# EAGLE board BMS Segment rev4 (EAGLE 8.4.1), part 1 of 2
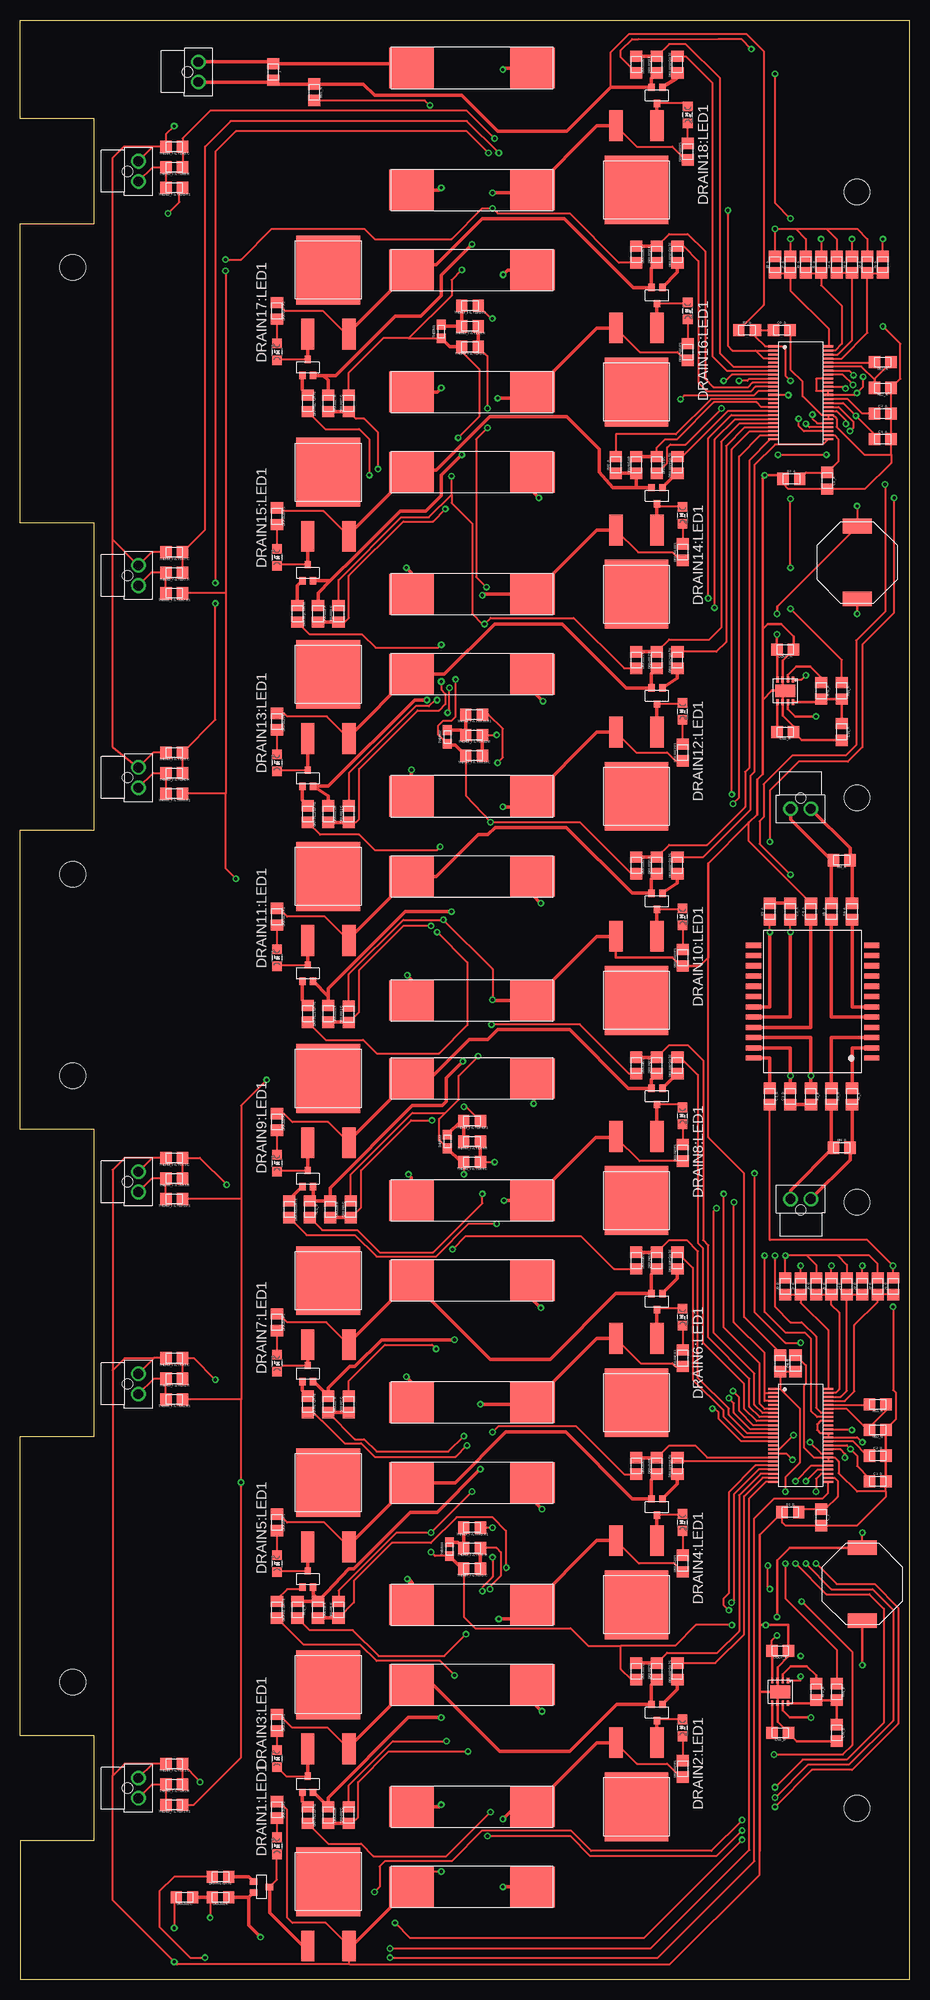
[diagram p0: board, top side]
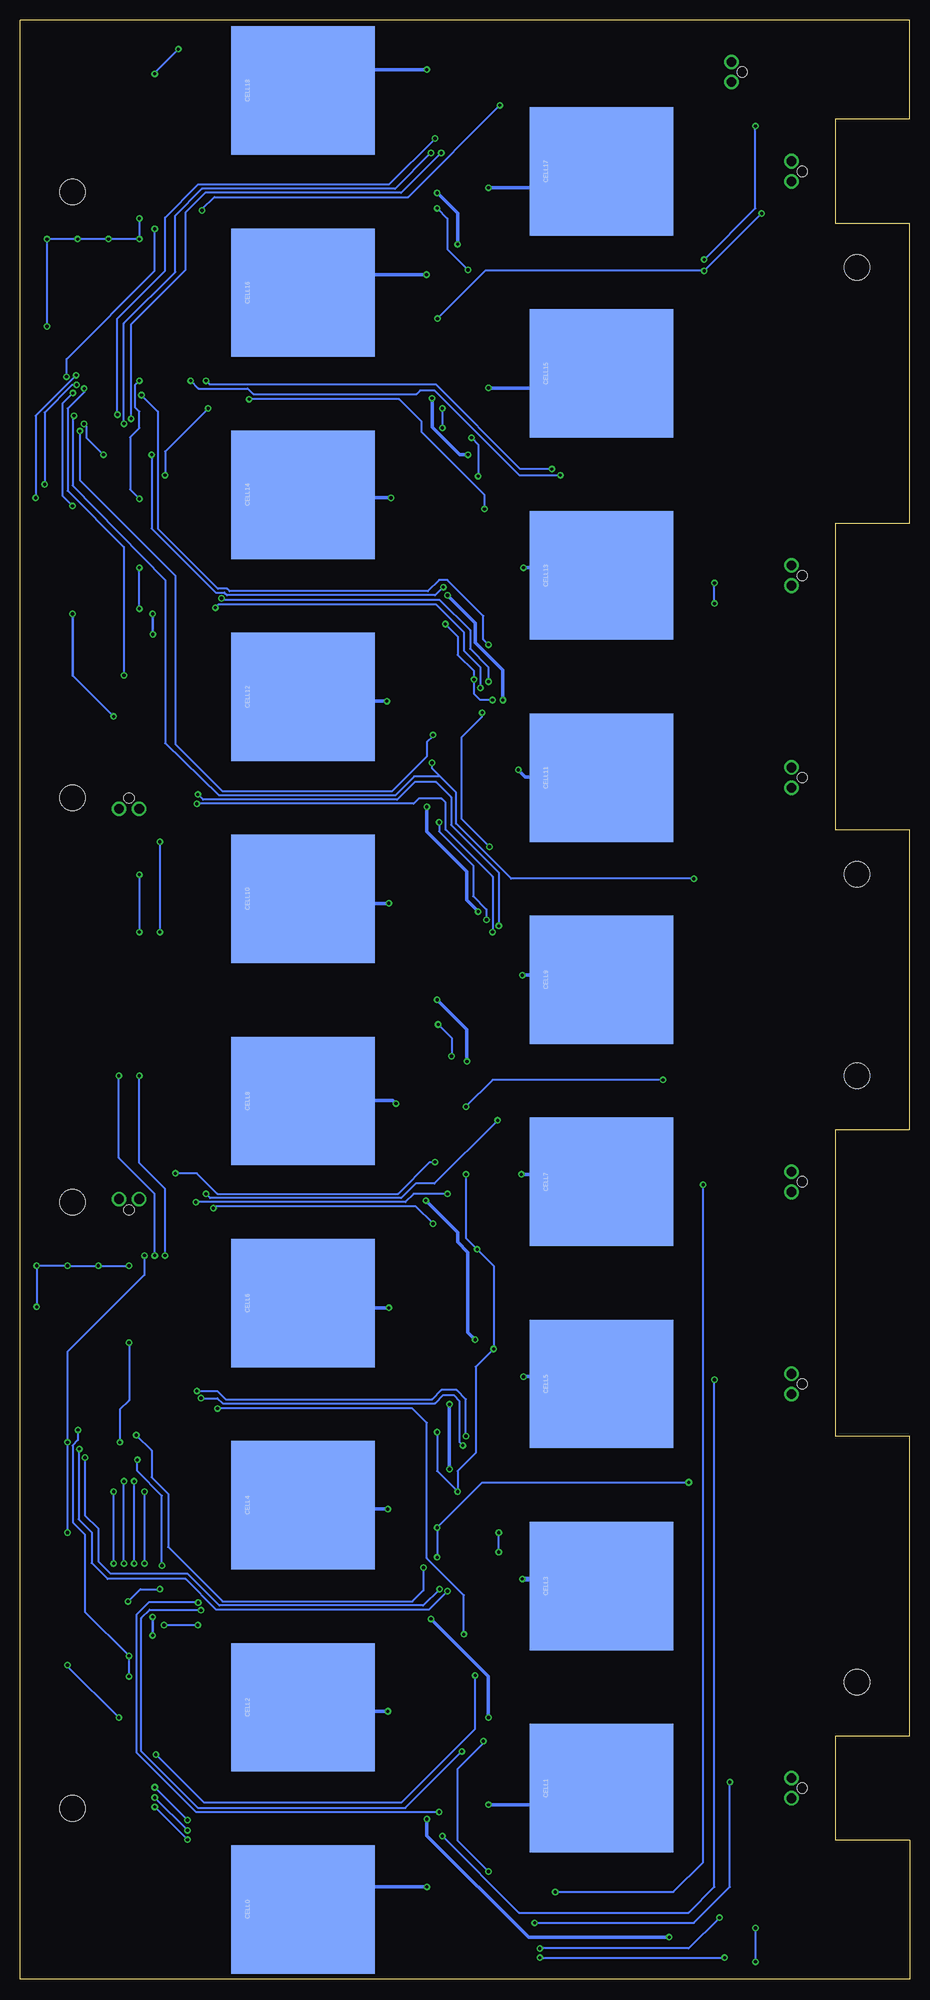
[diagram p1: board, bottom side, seen from below]

Size 109.98 x 242.34 mm. Coordinates in mm from the lower left corner, seen from the top.
Outline: 0,0 109.98,0 109.98,242.34 0,242.34 0,230.12 9.14,230.12 9.14,217.17 0,217.17 0,180.12 9.14,180.12 9.14,142.17 0,142.17 0,105.12 9.14,105.12 9.14,67.17 0,67.17 0,30.12 9.14,30.12 9.14,17.17 0,17.17 0,0
Copper layers (1*16): Top 0.035mm / dielectric 1.5mm / Bottom 0.035mm
Design rules "DRC Advanced Circuits": minimum track width 6mil, minimum drill 15mil, track to track 6mil, track to pad 6mil, pad to pad 6mil, via to via 6mil, smd to smd 6mil, copper to edge 40mil, drill to drill 6mil, minimum pad ring 10mil, minimum via ring 8mil, stop-mask expansion 4mil, vias tented up to drill 0mil, thermal gap 10mil
Holes 3.2 mm at 6.5,36.77 6.5,111.77 103.5,96.14 103.5,21.14 6.5,136.71 103.5,146.14 6.49,211.77 103.5,221.11

## Footprints (pad centres in the part's own frame; a part is rotated, then mirrored left to right if it is on the bottom)
NANO-FIT_VERTICAL-2 = drill 1.2: P$1 -1.25,0; P$2 1.25,0 | hole 1.3: 0,-1.34
LFCSP-8 = smd 0.3 x 0.7: 1 -0.975,-1.4; 2 -0.325,-1.4; 3 0.325,-1.4; 4 0.975,-1.4; 5 0.975,1.4; 6 0.325,1.4; 7 -0.325,1.4; 8 -0.975,1.4 | smd 2.44 x 1.6: PAD 0,0
0805 = smd 1.4 x 1.5: 1 -1.025,0; 2 1.025,0
KEYSTONE5222 = smd 15.875 x 17.78: P$1 0,0
PWR163 = smd 1.651 x 3.81: 1 -2.54,-7.938; 2 2.54,-7.938 | smd 7.874 x 8.509: PAD 0,0
LED-805 = smd 1.2 x 1.2: A 0,-1.05; C 0,1.05
SOT23 = smd 0.8 x 0.9: 1 -0.675,-1; 2 0.675,-1; 3 0,1
5X20MM_FUSE = smd 5.5 x 5: P$1 -7.5,0; P$2 7.5,0
SRU1048 = smd 1.8 x 3.6: 1 -4.5,0; 2 4.5,0
0603 = smd 1.2 x 1.1: 1 -0.85,0; 2 0.85,0
SM51589PEL = smd 0.635 x 1.905: 1 0,0; 2 1.27,0; 3 2.54,0; 4 3.81,0; 5 5.08,0; 6 6.35,0; 7 7.62,0; 8 8.89,0; 9 10.16,0; 10 11.43,0; 11 12.7,0; 12 13.97,0; 13 13.97,14.605; 14 12.7,14.605; 15 11.43,14.605; 16 10.16,14.605; 17 8.89,14.605; 18 7.62,14.605; 19 6.35,14.605; 20 5.08,14.605; 21 3.81,14.605; 22 2.54,14.605; 23 1.27,14.605; 24 0,14.605
LTC6804 = smd 0.25 x 1.25: 1 -5.75,-3.37; 2 -5.25,-3.37; 3 -4.75,-3.37; 4 -4.25,-3.37; 5 -3.75,-3.37; 6 -3.25,-3.37; 7 -2.75,-3.37; 8 -2.25,-3.37; 9 -1.75,-3.37; 10 -1.25,-3.37; 11 -0.75,-3.37; 12 -0.25,-3.37; 13 0.25,-3.37; 14 0.75,-3.37; 15 1.25,-3.37; 16 1.75,-3.37; 17 2.25,-3.37; 18 2.75,-3.37; 19 3.25,-3.37; 20 3.75,-3.37; 21 4.25,-3.37; 22 4.75,-3.37; 23 5.25,-3.37; 24 5.75,-3.37; 25 5.75,3.38; 26 5.25,3.38; 27 4.75,3.38; 28 4.25,3.38; 29 3.75,3.38; 30 3.25,3.38; 31 2.75,3.38; 32 2.25,3.38; 33 1.75,3.38; 34 1.25,3.38; 35 0.75,3.38; 36 0.25,3.38; 37 -0.25,3.38; 38 -0.75,3.38; 39 -1.25,3.38; 40 -1.75,3.38; 41 -2.25,3.38; 42 -2.75,3.38; 43 -3.25,3.38; 44 -3.75,3.38; 45 -4.25,3.38; 46 -4.75,3.38; 47 -5.25,3.38; 48 -5.75,3.38

## Placement (x,y rotation side)
AMS_TEST_PORT1  CONNECTOR-2NANO-FIT_VERTICAL-2  [NANO-FIT_VERTICAL-2]  22.02,235.94 270 top
BUCK_CONV_A  ADP2360  [LFCSP-8]  94.61,159.38 180 top
BUCK_CONV_B  ADP2360  [LFCSP-8]  93.98,35.56 180 top
C1_A  1uF  [0805]  106.68,190.5 0 top
C1_B  1uF  [0805]  106.05,61.59 0 top
C2_A  1uF  [0805]  106.68,193.68 0 top
C2_B  1uF  [0805]  106.05,64.77 0 top
C3_A  15pF  [0805]  95.25,132.08 270 top
C3_B  15pF  [0805]  95.25,109.22 90 top
C4_A  10nF  [0805]  97.79,132.08 90 top
C4_B  10nF  [0805]  92.71,109.22 270 top
C5_A  10nF  [0805]  99.8,185.37 270 top
C6_A  0.1uF  [0805]  94.18,204.01 0 top
C6_B  0.1uF  [0805]  95.89,76.2 90 top
C_5  10nF  [0805]  99.06,57.15 270 top
CELL0  BATTERY_SPRING_KEYSTONE5222  [KEYSTONE5222]  75,8.64 270 bottom
CELL1  BATTERY_SPRING_KEYSTONE5222  [KEYSTONE5222]  38.1,23.65 270 bottom
CELL2  BATTERY_SPRING_KEYSTONE5222  [KEYSTONE5222]  75,33.64 270 bottom
CELL3  BATTERY_SPRING_KEYSTONE5222  [KEYSTONE5222]  38.1,48.65 270 bottom
CELL4  BATTERY_SPRING_KEYSTONE5222  [KEYSTONE5222]  75,58.64 270 bottom
CELL5  BATTERY_SPRING_KEYSTONE5222  [KEYSTONE5222]  38.1,73.65 270 bottom
CELL6  BATTERY_SPRING_KEYSTONE5222  [KEYSTONE5222]  75,83.64 270 bottom
CELL7  BATTERY_SPRING_KEYSTONE5222  [KEYSTONE5222]  38.1,98.65 270 bottom
CELL8  BATTERY_SPRING_KEYSTONE5222  [KEYSTONE5222]  75,108.64 270 bottom
CELL9  BATTERY_SPRING_KEYSTONE5222  [KEYSTONE5222]  38.1,123.65 270 bottom
CELL10  BATTERY_SPRING_KEYSTONE5222  [KEYSTONE5222]  75,133.64 270 bottom
CELL11  BATTERY_SPRING_KEYSTONE5222  [KEYSTONE5222]  38.1,148.65 270 bottom
CELL12  BATTERY_SPRING_KEYSTONE5222  [KEYSTONE5222]  75,158.64 270 bottom
CELL13  BATTERY_SPRING_KEYSTONE5222  [KEYSTONE5222]  38.1,173.65 270 bottom
CELL14  BATTERY_SPRING_KEYSTONE5222  [KEYSTONE5222]  75,183.64 270 bottom
CELL15  BATTERY_SPRING_KEYSTONE5222  [KEYSTONE5222]  38.1,198.65 270 bottom
CELL16  BATTERY_SPRING_KEYSTONE5222  [KEYSTONE5222]  75,208.64 270 bottom
CELL17  BATTERY_SPRING_KEYSTONE5222  [KEYSTONE5222]  38.1,223.65 270 bottom
CELL18  BATTERY_SPRING_KEYSTONE5222  [KEYSTONE5222]  75,233.64 270 bottom
CIN_A  4.7uF  [0805]  101.6,154.31 270 top
CIN_B  4.7uF  [0805]  100.96,30.48 270 top
COUT_A  22uF  [0805]  94.61,164.47 180 top
COUT_B  22uF  [0805]  93.98,40.64 180 top
CSS_A  2.2nF  [0805]  94.61,154.31 180 top
CSS_B  2.2nF  [0805]  93.98,30.48 180 top
DRAIN1:C  10nF  [0805]  20.32,10.16 180 top
DRAIN1:DISCHARGE  5Ω  [PWR163]  38.1,12.06 0 top
DRAIN1:GATE  3.3kΩ  [0805]  24.77,12.7 180 top
DRAIN1:LED1  RED  [LED-805]  31.75,16.51 0 top
DRAIN1:PFET  P-CHANNEL_MOSFET_DMP3099L-7  [SOT23]  29.84,11.43 270 top
DRAIN1:R  100Ω  [0805]  24.77,10.16 180 top
DRAIN1:R1  150  [0805]  31.75,20.95 270 top
DRAIN2:C  10nF  [0805]  76.2,38.1 270 top
DRAIN2:DISCHARGE  5Ω  [PWR163]  76.2,21.34 180 top
DRAIN2:GATE  3.3kΩ  [0805]  81.28,38.1 90 top
DRAIN2:LED1  RED  [LED-805]  81.92,31.11 180 top
DRAIN2:PFET  P-CHANNEL_MOSFET_DMP3099L-7  [SOT23]  78.74,33.02 180 top
DRAIN2:R  100Ω  [0805]  78.74,38.1 90 top
DRAIN2:R1  150  [0805]  81.92,26.04 90 top
DRAIN3:C  10nF  [0805]  40.64,20.32 90 top
DRAIN3:DISCHARGE  5Ω  [PWR163]  38.1,36.43 0 top
DRAIN3:GATE  3.3kΩ  [0805]  35.56,20.32 270 top
DRAIN3:LED1  RED  [LED-805]  31.75,27.3 0 top
DRAIN3:PFET  P-CHANNEL_MOSFET_DMP3099L-7  [SOT23]  35.56,24.13 0 top
DRAIN3:R  100Ω  [0805]  38.1,20.32 270 top
DRAIN3:R1  150  [0805]  31.75,31.75 270 top
DRAIN4:C  10nF  [0805]  76.2,63.5 270 top
DRAIN4:DISCHARGE  5Ω  [PWR163]  76.2,46.34 180 top
DRAIN4:GATE  3.3kΩ  [0805]  81.28,63.5 90 top
DRAIN4:LED1  RED  [LED-805]  81.92,56.52 180 top
DRAIN4:PFET  P-CHANNEL_MOSFET_DMP3099L-7  [SOT23]  78.74,58.42 180 top
DRAIN4:R  100Ω  [0805]  78.74,63.5 90 top
DRAIN4:R1  150  [0805]  81.92,51.44 90 top
DRAIN5:C  10nF  [0805]  39.37,45.72 90 top
DRAIN5:DISCHARGE  5Ω  [PWR163]  38.1,61.43 0 top
DRAIN5:GATE  3.3kΩ  [0805]  31.75,45.72 270 top
DRAIN5:LED1  RED  [LED-805]  31.75,51.44 0 top
DRAIN5:PFET  P-CHANNEL_MOSFET_DMP3099L-7  [SOT23]  35.56,49.52 0 top
DRAIN5:R  100Ω  [0805]  36.83,45.72 270 top
DRAIN5:R1  150  [0805]  31.75,56.52 270 top
DRAIN6:C  10nF  [0805]  76.2,88.9 270 top
DRAIN6:DISCHARGE  5Ω  [PWR163]  76.2,71.34 180 top
DRAIN6:GATE  3.3kΩ  [0805]  81.28,88.9 90 top
DRAIN6:LED1  RED  [LED-805]  81.92,81.92 180 top
DRAIN6:PFET  P-CHANNEL_MOSFET_DMP3099L-7  [SOT23]  78.74,83.82 180 top
DRAIN6:R  100Ω  [0805]  78.74,88.9 90 top
DRAIN6:R1  150  [0805]  81.92,76.83 90 top
DRAIN7:C  10nF  [0805]  40.64,71.12 90 top
DRAIN7:DISCHARGE  5Ω  [PWR163]  38.1,86.43 0 top
DRAIN7:GATE  3.3kΩ  [0805]  35.56,71.12 270 top
DRAIN7:LED1  RED  [LED-805]  31.75,76.2 0 top
DRAIN7:PFET  P-CHANNEL_MOSFET_DMP3099L-7  [SOT23]  35.56,74.93 0 top
DRAIN7:R  100Ω  [0805]  38.1,71.12 270 top
DRAIN7:R1  150  [0805]  31.75,81.28 270 top
DRAIN8:C  10nF  [0805]  76.2,113.03 270 top
DRAIN8:DISCHARGE  5Ω  [PWR163]  76.2,96.34 180 top
DRAIN8:GATE  3.3kΩ  [0805]  81.28,113.03 90 top
DRAIN8:LED1  RED  [LED-805]  81.92,106.81 180 top
DRAIN8:PFET  P-CHANNEL_MOSFET_DMP3099L-7  [SOT23]  78.74,109.22 180 top
DRAIN8:R  100Ω  [0805]  78.74,113.03 90 top
DRAIN8:R1  150  [0805]  81.92,102.23 90 top
DRAIN9:C  10nF  [0805]  40.89,95.25 90 top
DRAIN9:DISCHARGE  5Ω  [PWR163]  38.1,111.43 0 top
DRAIN9:GATE  3.3kΩ  [0805]  33.27,95.25 270 top
DRAIN9:LED1  RED  [LED-805]  31.75,100.97 0 top
DRAIN9:PFET  P-CHANNEL_MOSFET_DMP3099L-7  [SOT23]  35.56,99.06 0 top
DRAIN9:R  100Ω  [0805]  38.35,95.25 270 top
DRAIN9:R1  150  [0805]  31.75,106.05 270 top
DRAIN10:C  10nF  [0805]  76.2,137.79 270 top
DRAIN10:DISCHARGE  5Ω  [PWR163]  76.2,121.08 180 top
DRAIN10:GATE  3.3kΩ  [0805]  81.28,137.79 90 top
DRAIN10:LED1  RED  [LED-805]  81.92,131.44 180 top
DRAIN10:PFET  P-CHANNEL_MOSFET_DMP3099L-7  [SOT23]  78.74,133.35 180 top
DRAIN10:R  100Ω  [0805]  78.74,137.79 90 top
DRAIN10:R1  150  [0805]  81.92,126.36 90 top
DRAIN11:C  10nF  [0805]  40.64,119.38 90 top
DRAIN11:DISCHARGE  5Ω  [PWR163]  38.1,136.43 0 top
DRAIN11:GATE  3.3kΩ  [0805]  35.56,119.43 270 top
DRAIN11:LED1  RED  [LED-805]  31.75,126.36 0 top
DRAIN11:PFET  P-CHANNEL_MOSFET_DMP3099L-7  [SOT23]  35.56,124.46 0 top
DRAIN11:R  100Ω  [0805]  38.1,119.43 270 top
DRAIN11:R1  150  [0805]  31.75,131.44 270 top
DRAIN12:C  10nF  [0805]  76.2,163.19 270 top
DRAIN12:DISCHARGE  5Ω  [PWR163]  76.2,146.34 180 top
DRAIN12:GATE  3.3kΩ  [0805]  81.28,163.19 90 top
DRAIN12:LED1  RED  [LED-805]  81.92,156.84 180 top
DRAIN12:PFET  P-CHANNEL_MOSFET_DMP3099L-7  [SOT23]  78.74,158.75 180 top
DRAIN12:R  100Ω  [0805]  78.74,163.19 90 top
DRAIN12:R1  150  [0805]  81.92,151.76 90 top
DRAIN13:C  10nF  [0805]  40.64,144.15 90 top
DRAIN13:DISCHARGE  5Ω  [PWR163]  38.1,161.43 0 top
DRAIN13:GATE  3.3kΩ  [0805]  35.56,144.15 270 top
DRAIN13:LED1  RED  [LED-805]  31.75,150.5 0 top
DRAIN13:PFET  P-CHANNEL_MOSFET_DMP3099L-7  [SOT23]  35.56,148.59 0 top
DRAIN13:R  100Ω  [0805]  38.1,144.15 270 top
DRAIN13:R1  150  [0805]  31.75,155.57 270 top
DRAIN14:C  10nF  [0805]  78.74,187.32 270 top
DRAIN14:DISCHARGE  5Ω  [PWR163]  76.2,171.34 180 top
DRAIN14:GATE  3.3kΩ  [0805]  81.28,187.32 90 top
DRAIN14:LED1  RED  [LED-805]  81.92,181.1 180 top
DRAIN14:PFET  P-CHANNEL_MOSFET_DMP3099L-7  [SOT23]  78.74,183.51 180 top
DRAIN14:R  100Ω  [0805]  76.2,187.32 90 top
DRAIN14:R1  150  [0805]  81.92,176.53 90 top
DRAIN15:C  10nF  [0805]  39.37,168.91 90 top
DRAIN15:DISCHARGE  5Ω  [PWR163]  38.1,186.43 0 top
DRAIN15:GATE  3.3kΩ  [0805]  34.29,168.91 270 top
DRAIN15:LED1  RED  [LED-805]  31.75,175.9 0 top
DRAIN15:PFET  P-CHANNEL_MOSFET_DMP3099L-7  [SOT23]  35.56,173.99 0 top
DRAIN15:R  100Ω  [0805]  36.83,168.91 270 top
DRAIN15:R1  150  [0805]  31.75,180.97 270 top
DRAIN16:C  10nF  [0805]  76.2,213.36 270 top
DRAIN16:DISCHARGE  5Ω  [PWR163]  76.2,196.34 180 top
DRAIN16:GATE  3.3kΩ  [0805]  81.28,213.36 90 top
DRAIN16:LED1  RED  [LED-805]  82.55,206.38 180 top
DRAIN16:PFET  P-CHANNEL_MOSFET_DMP3099L-7  [SOT23]  78.74,208.28 180 top
DRAIN16:R  100Ω  [0805]  78.74,213.36 90 top
DRAIN16:R1  150  [0805]  82.55,201.29 90 top
DRAIN17:C  10nF  [0805]  40.64,194.94 90 top
DRAIN17:DISCHARGE  5Ω  [PWR163]  38.1,211.43 0 top
DRAIN17:GATE  3.3kΩ  [0805]  35.56,194.94 270 top
DRAIN17:LED1  RED  [LED-805]  31.75,201.29 0 top
DRAIN17:PFET  P-CHANNEL_MOSFET_DMP3099L-7  [SOT23]  35.56,199.39 0 top
DRAIN17:R  100Ω  [0805]  38.1,194.94 270 top
DRAIN17:R1  150  [0805]  31.75,206.38 270 top
DRAIN18:C  10nF  [0805]  76.2,236.85 270 top
DRAIN18:DISCHARGE  5Ω  [PWR163]  76.2,221.34 180 top
DRAIN18:GATE  3.3kΩ  [0805]  81.28,236.85 90 top
DRAIN18:LED1  RED  [LED-805]  82.55,230.63 180 top
DRAIN18:PFET  P-CHANNEL_MOSFET_DMP3099L-7  [SOT23]  78.74,233.04 180 top
DRAIN18:R  100Ω  [0805]  78.74,236.85 90 top
DRAIN18:R1  150  [0805]  82.55,226.06 90 top
F0  0001.2704.11  [5X20MM_FUSE]  55.88,11.43 180 top
F1  0001.2704.11  [5X20MM_FUSE]  55.88,21.34 0 top
F2  0001.2704.11  [5X20MM_FUSE]  55.88,36.43 180 top
F3  0001.2704.11  [5X20MM_FUSE]  55.88,46.34 0 top
F4  0001.2704.11  [5X20MM_FUSE]  55.88,61.43 180 top
F5  0001.2704.11  [5X20MM_FUSE]  55.88,71.34 0 top
F6  0001.2704.11  [5X20MM_FUSE]  55.88,86.43 180 top
F7  0001.2704.11  [5X20MM_FUSE]  55.88,96.34 0 top
F8  0001.2704.11  [5X20MM_FUSE]  55.88,111.43 180 top
F9  0001.2704.11  [5X20MM_FUSE]  55.88,121.08 0 top
F10  0001.2704.11  [5X20MM_FUSE]  55.88,136.43 180 top
F11  0001.2704.11  [5X20MM_FUSE]  55.88,146.34 0 top
F12  0001.2704.11  [5X20MM_FUSE]  55.88,161.43 180 top
F13  0001.2704.11  [5X20MM_FUSE]  55.88,171.34 0 top
F14  0001.2704.11  [5X20MM_FUSE]  55.88,186.43 180 top
F15  0001.2704.11  [5X20MM_FUSE]  55.88,196.34 0 top
F16  0001.2704.11  [5X20MM_FUSE]  55.88,211.43 180 top
F17  0001.2704.11  [5X20MM_FUSE]  55.88,221.34 0 top
F18  0001.2704.11  [5X20MM_FUSE]  55.88,236.43 180 top
ISOSPI_A  CONNECTOR-2NANO-FIT_VERTICAL-2  [NANO-FIT_VERTICAL-2]  96.52,144.78 180 top
ISOSPI_B  CONNECTOR-2NANO-FIT_VERTICAL-2  [NANO-FIT_VERTICAL-2]  96.52,96.52 0 top
J  [0805]  31.29,235.94 270 top
J1_A  [0805]  106.68,212.09 90 top
J1_B  [0805]  107.95,85.72 90 top
J2_A  [0805]  104.77,212.09 90 top
J2_B  [0805]  106.05,85.72 90 top
J3_A  [0805]  102.87,212.09 90 top
J3_B  [0805]  104.14,85.72 90 top
J4_A  [0805]  100.96,212.09 90 top
J4_B  [0805]  102.23,85.72 90 top
J5_A  [0805]  99.06,212.09 90 top
J5_B  [0805]  100.33,85.72 90 top
J6_A  [0805]  97.16,212.09 90 top
J6_B  [0805]  98.42,85.72 90 top
J7_A  [0805]  95.25,212.09 90 top
J7_B  [0805]  96.52,85.72 90 top
J8_A  [0805]  93.35,212.09 90 top
J8_B  [0805]  94.61,85.72 90 top
L1_A  330uH  [SRU1048]  103.51,175.26 90 top
L1_B  330uH  [SRU1048]  104.14,48.9 90 top
R1_A  100Ω  [0805]  89.89,204.01 0 top
R1_B  100Ω  [0805]  93.98,76.2 270 top
R2_A  100Ω  [0805]  95.38,185.6 0 top
R2_B  100Ω  [0805]  95.25,57.78 0 top
R3_A  402Ω  [0805]  92.71,132.08 90 top
R3_B  402Ω  [0805]  97.79,109.22 270 top
R4_A  22Ω  [0805]  102.87,132.08 90 top
R4_B  22Ω  [0805]  100.33,109.22 270 top
R5_A  22Ω  [0805]  100.33,132.08 90 top
R5_B  22Ω  [0805]  102.87,109.22 270 top
RB1_A  1.2kΩ  [0805]  106.68,200.03 180 top
RB1_B  1.2kΩ  [0805]  106.05,71.12 180 top
RB2_A  800Ω  [0805]  106.68,196.85 180 top
RB2_B  800Ω  [0805]  106.05,67.94 180 top
RIN_A  1kΩ  [0805]  101.6,159.38 270 top
RIN_B  1kΩ  [0805]  100.96,35.56 270 top
RM_A  100Ω  [0805]  101.6,138.43 180 top
RM_B  100Ω  [0805]  101.6,102.87 0 top
RPG_A  1kΩ  [0805]  99.06,159.38 270 top
RPG_B  1kΩ  [0805]  98.42,35.56 270 top
RU1_A  100Ω  [0805]  36.37,233.43 270 top
RU1_B  100Ω  [0805]  35.81,95.25 270 top
RU2_A  100Ω  [0805]  73.66,187.32 90 top
RU2_B  100Ω  [0805]  34.29,45.72 270 top
THERM1  10kΩ  [0603]  52.07,203.84 90 top
THERM1_B  Th1  [NANO-FIT_VERTICAL-2]  14.61,23.65 270 top
THERM1A  Th1  [NANO-FIT_VERTICAL-2]  14.61,148.65 270 top
THERM2  10kΩ  [0603]  52.83,153.67 90 top
THERM2_B  Th2  [NANO-FIT_VERTICAL-2]  14.61,73.65 270 top
THERM2A  Th2  [NANO-FIT_VERTICAL-2]  14.61,173.65 270 top
THERM3  10kΩ  [0603]  52.83,103.63 90 top
THERM3_B  Th3  [NANO-FIT_VERTICAL-2]  14.61,98.65 270 top
THERM3A  Th3  [NANO-FIT_VERTICAL-2]  14.61,223.65 270 top
THERM4  10kΩ  [0603]  53.09,53.21 90 top
THERM_FILTER1:C  10nF  [0805]  19.05,26.67 180 top
THERM_FILTER1:R  100Ω  [0805]  19.05,24.13 180 top
THERM_FILTER1:R1  10kΩ  [0805]  19.05,21.59 180 top
THERM_FILTER2:C  10nF  [0805]  19.05,76.83 180 top
THERM_FILTER2:R  100Ω  [0805]  19.05,74.3 180 top
THERM_FILTER2:R1  10kΩ  [0805]  19.05,71.75 180 top
THERM_FILTER3:C  10nF  [0805]  19.05,101.6 180 top
THERM_FILTER3:R  100Ω  [0805]  19.05,99.06 180 top
THERM_FILTER3:R1  10kΩ  [0805]  19.05,96.52 180 top
THERM_FILTER4:C  10nF  [0805]  55.88,101.09 180 top
THERM_FILTER4:R  100Ω  [0805]  55.88,103.63 180 top
THERM_FILTER4:R1  10kΩ  [0805]  55.88,106.17 180 top
THERM_FILTER5:C  10nF  [0805]  55.88,50.8 180 top
THERM_FILTER5:R  100Ω  [0805]  55.88,53.34 180 top
THERM_FILTER5:R1  10kΩ  [0805]  55.88,55.88 180 top
THERM_FILTER6:C  10nF  [0805]  19.05,151.76 180 top
THERM_FILTER6:R  100Ω  [0805]  19.05,149.22 180 top
THERM_FILTER6:R1  10kΩ  [0805]  19.05,146.69 180 top
THERM_FILTER7:C  10nF  [0805]  19.05,176.53 180 top
THERM_FILTER7:R  100Ω  [0805]  19.05,173.99 180 top
THERM_FILTER7:R1  10kΩ  [0805]  19.05,171.45 180 top
THERM_FILTER8:C  10nF  [0805]  19.05,226.69 180 top
THERM_FILTER8:R  100Ω  [0805]  19.05,224.16 180 top
THERM_FILTER8:R1  10kΩ  [0805]  19.05,221.62 180 top
THERM_FILTER9:C  10nF  [0805]  55.63,201.93 180 top
THERM_FILTER9:R  100Ω  [0805]  55.63,204.47 180 top
THERM_FILTER9:R1  10kΩ  [0805]  55.63,207.01 180 top
THERM_FILTER10:C  10nF  [0805]  56.13,151.38 180 top
THERM_FILTER10:R  100Ω  [0805]  56.13,153.92 180 top
THERM_FILTER10:R1  10kΩ  [0805]  56.13,156.46 180 top
TRANSFORMER  [SM51589PEL]  105.31,113.94 90 top
U$1  LTC6804-2  [LTC6804]  96.52,196.24 270 top
U$2  LTC6804-2  [LTC6804]  96.52,67.3 270 top

## Library data of the parts
AMS_TEST_PORT1 BUCK_CONV_A BUCK_CONV_B C1_A C1_B C2_A C2_B C3_A C3_B C4_A C4_B C5_A C6_A C6_B C_5 CELL0 CELL1-CELL18 CIN_A CIN_B COUT_A COUT_B CSS_A CSS_B DRAIN1:C DRAIN1:DISCHARGE DRAIN1:GATE DRAIN1:LED1 DRAIN1:PFET DRAIN1:R DRAIN1:R1 DRAIN2:C DRAIN2:DISCHARGE DRAIN2:GATE DRAIN2:LED1 DRAIN2:PFET DRAIN2:R DRAIN2:R1 DRAIN3:C DRAIN3:DISCHARGE DRAIN3:GATE DRAIN3:LED1 DRAIN3:PFET DRAIN3:R DRAIN3:R1 DRAIN4:C DRAIN4:DISCHARGE DRAIN4:GATE DRAIN4:LED1 DRAIN4:PFET DRAIN4:R DRAIN4:R1 DRAIN5:C DRAIN5:DISCHARGE DRAIN5:GATE DRAIN5:LED1 DRAIN5:PFET DRAIN5:R DRAIN5:R1 DRAIN6:C DRAIN6:DISCHARGE DRAIN6:GATE DRAIN6:LED1 DRAIN6:PFET DRAIN6:R DRAIN6:R1 DRAIN7:C DRAIN7:DISCHARGE DRAIN7:GATE DRAIN7:LED1 DRAIN7:PFET DRAIN7:R DRAIN7:R1 DRAIN8:C DRAIN8:DISCHARGE DRAIN8:GATE DRAIN8:LED1 DRAIN8:PFET DRAIN8:R DRAIN8:R1 DRAIN9:C DRAIN9:DISCHARGE DRAIN9:GATE DRAIN9:LED1 DRAIN9:PFET DRAIN9:R DRAIN9:R1 DRAIN10:C DRAIN10:DISCHARGE DRAIN10:GATE DRAIN10:LED1 DRAIN10:PFET DRAIN10:R DRAIN10:R1 DRAIN11:C DRAIN11:DISCHARGE DRAIN11:GATE DRAIN11:LED1 DRAIN11:PFET DRAIN11:R DRAIN11:R1 DRAIN12:C DRAIN12:DISCHARGE DRAIN12:GATE DRAIN12:LED1 DRAIN12:PFET DRAIN12:R DRAIN12:R1 DRAIN13:C DRAIN13:DISCHARGE DRAIN13:GATE DRAIN13:LED1 DRAIN13:PFET DRAIN13:R DRAIN13:R1 DRAIN14:C DRAIN14:DISCHARGE DRAIN14:GATE DRAIN14:LED1 DRAIN14:PFET DRAIN14:R DRAIN14:R1 DRAIN15:C DRAIN15:DISCHARGE DRAIN15:GATE DRAIN15:LED1 DRAIN15:PFET DRAIN15:R DRAIN15:R1 DRAIN16:C DRAIN16:DISCHARGE DRAIN16:GATE DRAIN16:LED1 DRAIN16:PFET DRAIN16:R DRAIN16:R1 DRAIN17:C DRAIN17:DISCHARGE DRAIN17:GATE DRAIN17:LED1 DRAIN17:PFET DRAIN17:R DRAIN17:R1 DRAIN18:C DRAIN18:DISCHARGE DRAIN18:GATE DRAIN18:LED1 DRAIN18:PFET DRAIN18:R DRAIN18:R1 F0 F1-F18 ISOSPI_A ISOSPI_B J J1_A J1_B J2_A J2_B J3_A J3_B J4_A J4_B J5_A J5_B J6_A J6_B J7_A J7_B J8_A J8_B L1_A L1_B R1_A R1_B R2_A R2_B R3_A R3_B R4_A R4_B R5_A R5_B RB1_A RB1_B RB2_A RB2_B RIN_A RIN_B RM_A RM_B RPG_A RPG_B RU1_A RU1_B RU2_A RU2_B THERM1 THERM1_B THERM1A THERM2 THERM2_B THERM2A THERM3 THERM3_B THERM3A THERM4 THERM_FILTER1:C THERM_FILTER1:R THERM_FILTER1:R1 THERM_FILTER2:C THERM_FILTER2:R THERM_FILTER2:R1 THERM_FILTER3:C THERM_FILTER3:R THERM_FILTER3:R1 THERM_FILTER4:C THERM_FILTER4:R THERM_FILTER4:R1 THERM_FILTER5:C THERM_FILTER5:R THERM_FILTER5:R1 THERM_FILTER6:C THERM_FILTER6:R THERM_FILTER6:R1 THERM_FILTER7:C THERM_FILTER7:R THERM_FILTER7:R1 THERM_FILTER8:C THERM_FILTER8:R THERM_FILTER8:R1 THERM_FILTER9:C THERM_FILTER9:R THERM_FILTER9:R1 THERM_FILTER10:C THERM_FILTER10:R THERM_FILTER10:R1 TRANSFORMER U$1 U$2 = HyTechDevices

## Nets
C0_A: C5_A.1 R2_A.2 U$1.26
C0_B: C_5.1 R2_B.2 U$2.26
C1_A: DRAIN10:C.1 DRAIN10:R.2 U$1.24
C1_B: DRAIN1:C.1 DRAIN1:R.2 U$2.24
C2_A: DRAIN11:C.1 DRAIN11:R.2 U$1.22
C2_B: DRAIN2:C.1 DRAIN2:R.2 U$2.22
C3_A: DRAIN12:C.1 DRAIN12:R.2 U$1.20
C3_B: DRAIN3:C.1 DRAIN3:R.2 U$2.20
C4_A: DRAIN13:C.1 DRAIN13:R.2 U$1.18
C4_B: DRAIN4:C.1 DRAIN4:R.2 U$2.18
C5_A: DRAIN14:C.1 DRAIN14:R.2 U$1.16
C5_B: DRAIN5:C.1 DRAIN5:R.2 U$2.16
C7_A: DRAIN15:C.1 DRAIN15:R.2 U$1.12
C7_B: DRAIN6:C.1 DRAIN6:R.2 U$2.12
C8_A: DRAIN16:C.1 DRAIN16:R.2 U$1.10
C8_B: DRAIN7:C.1 DRAIN7:R.2 U$2.10
C9_A: DRAIN17:C.1 DRAIN17:R.2 U$1.8
C9_B: DRAIN8:C.1 DRAIN8:R.2 U$2.8
C10_A: DRAIN18:C.1 DRAIN18:R.2 U$1.6
C10_B: DRAIN9:C.1 DRAIN9:R.2 U$2.6
CC0: CELL0.P$1 F0.P$1
CC1: CELL1.P$1 F1.P$1
CC2: CELL2.P$1 F2.P$1
CC3: CELL3.P$1 F3.P$1
CC4: CELL4.P$1 F4.P$1
CC5: CELL5.P$1 F5.P$1
CC6: CELL6.P$1 F6.P$1
CC7: CELL7.P$1 F7.P$1
CC8: CELL8.P$1 F8.P$1
CC9: CELL9.P$1 F9.P$1
CC10: CELL10.P$1 F10.P$1
CC11: CELL11.P$1 F11.P$1
CC12: CELL12.P$1 F12.P$1
CC13: CELL13.P$1 F13.P$1
CC14: CELL14.P$1 F14.P$1
CC15: CELL15.P$1 F15.P$1
CC16: CELL16.P$1 F16.P$1
CC17: CELL17.P$1 F17.P$1
CC18: CELL18.P$1 F18.P$1
DRAIN1:GATE: DRAIN1:GATE.1 DRAIN1:PFET.1
DRAIN1:N$1: DRAIN1:DISCHARGE.1 DRAIN1:LED1.A DRAIN1:PFET.3
DRAIN1:N$2: DRAIN1:LED1.C DRAIN1:R1.2
DRAIN2:GATE: DRAIN2:GATE.1 DRAIN2:PFET.1
DRAIN2:N$1: DRAIN2:DISCHARGE.1 DRAIN2:LED1.A DRAIN2:PFET.3
DRAIN2:N$2: DRAIN2:LED1.C DRAIN2:R1.2
DRAIN3:GATE: DRAIN3:GATE.1 DRAIN3:PFET.1
DRAIN3:N$1: DRAIN3:DISCHARGE.1 DRAIN3:LED1.A DRAIN3:PFET.3
DRAIN3:N$2: DRAIN3:LED1.C DRAIN3:R1.2
DRAIN4:GATE: DRAIN4:GATE.1 DRAIN4:PFET.1
DRAIN4:N$1: DRAIN4:DISCHARGE.1 DRAIN4:LED1.A DRAIN4:PFET.3
DRAIN4:N$2: DRAIN4:LED1.C DRAIN4:R1.2
DRAIN5:GATE: DRAIN5:GATE.1 DRAIN5:PFET.1
DRAIN5:N$1: DRAIN5:DISCHARGE.1 DRAIN5:LED1.A DRAIN5:PFET.3
DRAIN5:N$2: DRAIN5:LED1.C DRAIN5:R1.2
DRAIN6:GATE: DRAIN6:GATE.1 DRAIN6:PFET.1
DRAIN6:N$1: DRAIN6:DISCHARGE.1 DRAIN6:LED1.A DRAIN6:PFET.3
DRAIN6:N$2: DRAIN6:LED1.C DRAIN6:R1.2
DRAIN7:GATE: DRAIN7:GATE.1 DRAIN7:PFET.1
DRAIN7:N$1: DRAIN7:DISCHARGE.1 DRAIN7:LED1.A DRAIN7:PFET.3
DRAIN7:N$2: DRAIN7:LED1.C DRAIN7:R1.2
DRAIN8:GATE: DRAIN8:GATE.1 DRAIN8:PFET.1
DRAIN8:N$1: DRAIN8:DISCHARGE.1 DRAIN8:LED1.A DRAIN8:PFET.3
DRAIN8:N$2: DRAIN8:LED1.C DRAIN8:R1.2
DRAIN9:GATE: DRAIN9:GATE.1 DRAIN9:PFET.1
DRAIN9:N$1: DRAIN9:DISCHARGE.1 DRAIN9:LED1.A DRAIN9:PFET.3
DRAIN9:N$2: DRAIN9:LED1.C DRAIN9:R1.2
DRAIN10:GATE: DRAIN10:GATE.1 DRAIN10:PFET.1
DRAIN10:N$1: DRAIN10:DISCHARGE.1 DRAIN10:LED1.A DRAIN10:PFET.3
DRAIN10:N$2: DRAIN10:LED1.C DRAIN10:R1.2
DRAIN11:GATE: DRAIN11:GATE.1 DRAIN11:PFET.1
DRAIN11:N$1: DRAIN11:DISCHARGE.1 DRAIN11:LED1.A DRAIN11:PFET.3
DRAIN11:N$2: DRAIN11:LED1.C DRAIN11:R1.2
DRAIN12:GATE: DRAIN12:GATE.1 DRAIN12:PFET.1
DRAIN12:N$1: DRAIN12:DISCHARGE.1 DRAIN12:LED1.A DRAIN12:PFET.3
DRAIN12:N$2: DRAIN12:LED1.C DRAIN12:R1.2
DRAIN13:GATE: DRAIN13:GATE.1 DRAIN13:PFET.1
DRAIN13:N$1: DRAIN13:DISCHARGE.1 DRAIN13:LED1.A DRAIN13:PFET.3
DRAIN13:N$2: DRAIN13:LED1.C DRAIN13:R1.2
DRAIN14:GATE: DRAIN14:GATE.1 DRAIN14:PFET.1
DRAIN14:N$1: DRAIN14:DISCHARGE.1 DRAIN14:LED1.A DRAIN14:PFET.3
DRAIN14:N$2: DRAIN14:LED1.C DRAIN14:R1.2
DRAIN15:GATE: DRAIN15:GATE.1 DRAIN15:PFET.1
DRAIN15:N$1: DRAIN15:DISCHARGE.1 DRAIN15:LED1.A DRAIN15:PFET.3
DRAIN15:N$2: DRAIN15:LED1.C DRAIN15:R1.2
DRAIN16:GATE: DRAIN16:GATE.1 DRAIN16:PFET.1
DRAIN16:N$1: DRAIN16:DISCHARGE.1 DRAIN16:LED1.A DRAIN16:PFET.3
DRAIN16:N$2: DRAIN16:LED1.C DRAIN16:R1.2
DRAIN17:GATE: DRAIN17:GATE.1 DRAIN17:PFET.1
DRAIN17:N$1: DRAIN17:DISCHARGE.1 DRAIN17:LED1.A DRAIN17:PFET.3
DRAIN17:N$2: DRAIN17:LED1.C DRAIN17:R1.2
DRAIN18:GATE: DRAIN18:GATE.1 DRAIN18:PFET.1
DRAIN18:N$1: DRAIN18:DISCHARGE.1 DRAIN18:LED1.A DRAIN18:PFET.3
DRAIN18:N$2: DRAIN18:LED1.C DRAIN18:R1.2
DRIVE_A: BUCK_CONV_A.1 U$1.38
DRIVE_B: BUCK_CONV_B.1 U$2.38
GPIO1_A: THERM_FILTER6:C.1 THERM_FILTER6:R.1 U$1.27
GPIO1_B: THERM_FILTER1:C.1 THERM_FILTER1:R.1 U$2.27
GPIO2_A: THERM_FILTER7:C.1 THERM_FILTER7:R.1 U$1.28
GPIO2_B: THERM_FILTER2:C.1 THERM_FILTER2:R.1 U$2.28
GPIO3_A: THERM_FILTER8:C.1 THERM_FILTER8:R.1 U$1.29
GPIO3_B: THERM_FILTER3:C.1 THERM_FILTER3:R.1 U$2.29
GPIO4_A: THERM_FILTER9:C.1 THERM_FILTER9:R.1 U$1.32
GPIO4_B: THERM_FILTER4:C.1 THERM_FILTER4:R.1 U$2.32
GPIO5_A: THERM_FILTER10:C.1 THERM_FILTER10:R.1 U$1.33
GPIO5_B: THERM_FILTER5:C.1 THERM_FILTER5:R.1 U$2.33
IM_A: C3_A.2 TRANSFORMER.20 U$1.41
IM_B: C3_B.2 TRANSFORMER.23 U$2.41
IP_A: R3_A.1 TRANSFORMER.19 U$1.42
IP_B: R3_B.1 TRANSFORMER.22 U$2.42
ISOSPI-M_A: ISOSPI_A.P$2 R5_A.2 RM_A.2
ISOSPI-M_B: ISOSPI_B.P$2 R5_B.2 RM_B.2
ISOSPI-P_A: ISOSPI_A.P$1 R4_A.2 RM_A.1
ISOSPI-P_B: ISOSPI_B.P$1 R4_B.2 RM_B.1
N$1: C4_B.1 TRANSFORMER.24
N$2: RB1_B.2 U$2.44
N$3: THERM1_B.P$2 THERM_FILTER1:R1.2 THERM_FILTER1:R.2
N$4: RB1_B.1 RB2_B.2 U$2.43
N$5: R4_B.1 TRANSFORMER.3
N$6: RB1_A.2 U$1.44
N$7: R5_B.1 TRANSFORMER.2
N$8: J7_B.1 J8_B.1 U$2.48
N$9: J5_B.1 J6_B.1 U$2.47
N$10: C3_B.1 R3_B.2
N$11: BUCK_CONV_B.8 CIN_B.1 RIN_B.2 RPG_B.2
N$12: BUCK_CONV_B.2 RPG_B.1
N$13: J3_B.1 J4_B.1 U$2.46
N$14: BUCK_CONV_B.5 CSS_B.2
N$15: BUCK_CONV_B.7 L1_B.1
N$16: J1_B.1 J2_B.1 U$2.45
N$17: THERM4.2 THERM_FILTER5:R1.2 THERM_FILTER5:R.2
N$18: THERM2_B.P$2 THERM_FILTER2:R1.2 THERM_FILTER2:R.2
N$19: THERM3.2 THERM_FILTER4:R1.2 THERM_FILTER4:R.2
N$20: RB1_A.1 RB2_A.2 U$1.43
N$21: C4_A.1 TRANSFORMER.21
N$22: R4_A.1 TRANSFORMER.6
N$23: R5_A.1 TRANSFORMER.5
N$24: C3_A.1 R3_A.2
N$25: BUCK_CONV_A.8 CIN_A.1 RIN_A.2 RPG_A.2
N$26: THERM3_B.P$2 THERM_FILTER3:R1.2 THERM_FILTER3:R.2
N$27: BUCK_CONV_A.2 RPG_A.1
N$28: BUCK_CONV_A.5 CSS_A.2
N$29: BUCK_CONV_A.7 L1_A.1
N$30: J7_A.1 J8_A.1 U$1.48
N$31: J5_A.1 J6_A.1 U$1.47
N$32: J3_A.1 J4_A.1 U$1.46
N$33: J1_A.1 J2_A.1 U$1.45
N$34: THERM1.2 THERM_FILTER9:R1.2 THERM_FILTER9:R.2
N$35: THERM3A.P$2 THERM_FILTER8:R1.2 THERM_FILTER8:R.2
N$36: THERM2.2 THERM_FILTER10:R1.2 THERM_FILTER10:R.2
N$37: THERM2A.P$2 THERM_FILTER7:R1.2 THERM_FILTER7:R.2
N$38: THERM1A.P$2 THERM_FILTER6:R1.2 THERM_FILTER6:R.2
S1_A: DRAIN10:GATE.2 U$1.25
S1_B: DRAIN1:GATE.2 U$2.25
S2_A: DRAIN11:GATE.2 U$1.23
S2_B: DRAIN2:GATE.2 U$2.23
S3_A: DRAIN12:GATE.2 U$1.21
S3_B: DRAIN3:GATE.2 U$2.21
S4_A: DRAIN13:GATE.2 U$1.19
S4_B: DRAIN4:GATE.2 U$2.19
S5_A: DRAIN14:GATE.2 U$1.17
S5_B: DRAIN5:GATE.2 U$2.17
S7_A: DRAIN15:GATE.2 U$1.13
S7_B: DRAIN6:GATE.2 U$2.13
S8_A: DRAIN16:GATE.2 U$1.11
S8_B: DRAIN7:GATE.2 U$2.11
S9_A: DRAIN17:GATE.2 U$1.9
S9_B: DRAIN8:GATE.2 U$2.9
S10_A: DRAIN18:GATE.2 U$1.7
S10_B: DRAIN9:GATE.2 U$2.7
SENSE1: DRAIN1:PFET.2 DRAIN1:R.1 DRAIN2:DISCHARGE.2 DRAIN2:R1.1 F1.P$2
SENSE2: DRAIN2:PFET.2 DRAIN2:R.1 DRAIN3:DISCHARGE.2 DRAIN3:R1.1 F2.P$2
SENSE3: DRAIN3:PFET.2 DRAIN3:R.1 DRAIN4:DISCHARGE.2 DRAIN4:R1.1 F3.P$2
SENSE4: DRAIN4:PFET.2 DRAIN4:R.1 DRAIN5:DISCHARGE.2 DRAIN5:R1.1 F4.P$2
SENSE5: DRAIN5:PFET.2 DRAIN5:R.1 DRAIN6:DISCHARGE.2 DRAIN6:R1.1 F5.P$2 RU2_B.1
SENSE6: DRAIN6:PFET.2 DRAIN6:R.1 DRAIN7:DISCHARGE.2 DRAIN7:R1.1 F6.P$2
SENSE7: DRAIN7:PFET.2 DRAIN7:R.1 DRAIN8:DISCHARGE.2 DRAIN8:R1.1 F7.P$2
SENSE8: DRAIN8:PFET.2 DRAIN8:R.1 DRAIN9:DISCHARGE.2 DRAIN9:R1.1 F8.P$2
SENSE10: DRAIN10:PFET.2 DRAIN10:R.1 DRAIN11:DISCHARGE.2 DRAIN11:R1.1 F10.P$2
SENSE11: DRAIN11:PFET.2 DRAIN11:R.1 DRAIN12:DISCHARGE.2 DRAIN12:R1.1 F11.P$2
SENSE12: DRAIN12:PFET.2 DRAIN12:R.1 DRAIN13:DISCHARGE.2 DRAIN13:R1.1 F12.P$2
SENSE13: DRAIN13:PFET.2 DRAIN13:R.1 DRAIN14:DISCHARGE.2 DRAIN14:R1.1 F13.P$2
SENSE14: DRAIN14:PFET.2 DRAIN14:R.1 DRAIN15:DISCHARGE.2 DRAIN15:R1.1 F14.P$2 RU2_A.1
SENSE15: DRAIN15:PFET.2 DRAIN15:R.1 DRAIN16:DISCHARGE.2 DRAIN16:R1.1 F15.P$2
SENSE16: DRAIN16:PFET.2 DRAIN16:R.1 DRAIN17:DISCHARGE.2 DRAIN17:R1.1 F16.P$2
SENSE17: DRAIN17:PFET.2 DRAIN17:R.1 DRAIN18:DISCHARGE.2 DRAIN18:R1.1 F17.P$2
SENSE18: AMS_TEST_PORT1.P$2 DRAIN18:PFET.2 DRAIN18:R.1 J.2 R1_A.1 RU1_A.1
SENSE18_J: AMS_TEST_PORT1.P$1 F18.P$2 J.1
UNUSED1_A: RU1_A.2 U$1.2 U$1.4
UNUSED1_B: RU1_B.2 U$2.2 U$2.4
UNUSED2_A: RU2_A.2 U$1.14
UNUSED2_B: RU2_B.2 U$2.14
V+_A: C6_A.1 R1_A.2 RIN_A.1 U$1.1
V+_B: C6_B.1 R1_B.2 RIN_B.1 U$2.1
V-_A: BUCK_CONV_A.3 BUCK_CONV_A.6 BUCK_CONV_A.PAD C1_A.2 C2_A.2 C4_A.2 C5_A.2 C6_A.2 CIN_A.2 COUT_A.1 CSS_A.1 DRAIN9:PFET.2 DRAIN9:R.1 DRAIN10:C.2 DRAIN10:DISCHARGE.2 DRAIN10:R1.1 DRAIN11:C.2 DRAIN12:C.2 DRAIN13:C.2 DRAIN14:C.2 DRAIN15:C.2 DRAIN16:C.2 DRAIN17:C.2 DRAIN18:C.2 F9.P$2 J1_A.2 J3_A.2 J5_A.2 J7_A.2 R1_B.1 R2_A.1 RB2_A.1 RU1_B.1 THERM1.1 THERM1A.P$1 THERM2.1 THERM2A.P$1 THERM3A.P$1 THERM_FILTER6:C.2 THERM_FILTER7:C.2 THERM_FILTER8:C.2 THERM_FILTER9:C.2 THERM_FILTER10:C.2 U$1.30 U$1.31
V-_B: BUCK_CONV_B.3 BUCK_CONV_B.6 BUCK_CONV_B.PAD C1_B.2 C2_B.2 C4_B.2 C6_B.2 C_5.2 CIN_B.2 COUT_B.1 CSS_B.1 DRAIN1:C.2 DRAIN1:DISCHARGE.2 DRAIN1:R1.1 DRAIN2:C.2 DRAIN3:C.2 DRAIN4:C.2 DRAIN5:C.2 DRAIN6:C.2 DRAIN7:C.2 DRAIN8:C.2 DRAIN9:C.2 F0.P$2 J1_B.2 J3_B.2 J5_B.2 J7_B.2 R2_B.1 RB2_B.1 THERM1_B.P$1 THERM2_B.P$1 THERM3.1 THERM3_B.P$1 THERM4.1 THERM_FILTER1:C.2 THERM_FILTER2:C.2 THERM_FILTER3:C.2 THERM_FILTER4:C.2 THERM_FILTER5:C.2 U$2.30 U$2.31
VREF1_A: C2_A.1 U$1.35
VREF1_B: C2_B.1 U$2.35
VREF2_A: C1_A.1 THERM_FILTER6:R1.1 THERM_FILTER7:R1.1 THERM_FILTER8:R1.1 THERM_FILTER9:R1.1 THERM_FILTER10:R1.1 U$1.34
VREF2_B: C1_B.1 THERM_FILTER1:R1.1 THERM_FILTER2:R1.1 THERM_FILTER3:R1.1 THERM_FILTER4:R1.1 THERM_FILTER5:R1.1 U$2.34
VREG_A: BUCK_CONV_A.4 COUT_A.2 J2_A.2 J4_A.2 J6_A.2 J8_A.2 L1_A.2 U$1.36 U$1.37 U$1.40
VREG_B: BUCK_CONV_B.4 COUT_B.2 J2_B.2 J4_B.2 J6_B.2 J8_B.2 L1_B.2 U$2.36 U$2.37 U$2.40